# EAGLE board ARM-OB (EAGLE 6.5.0)
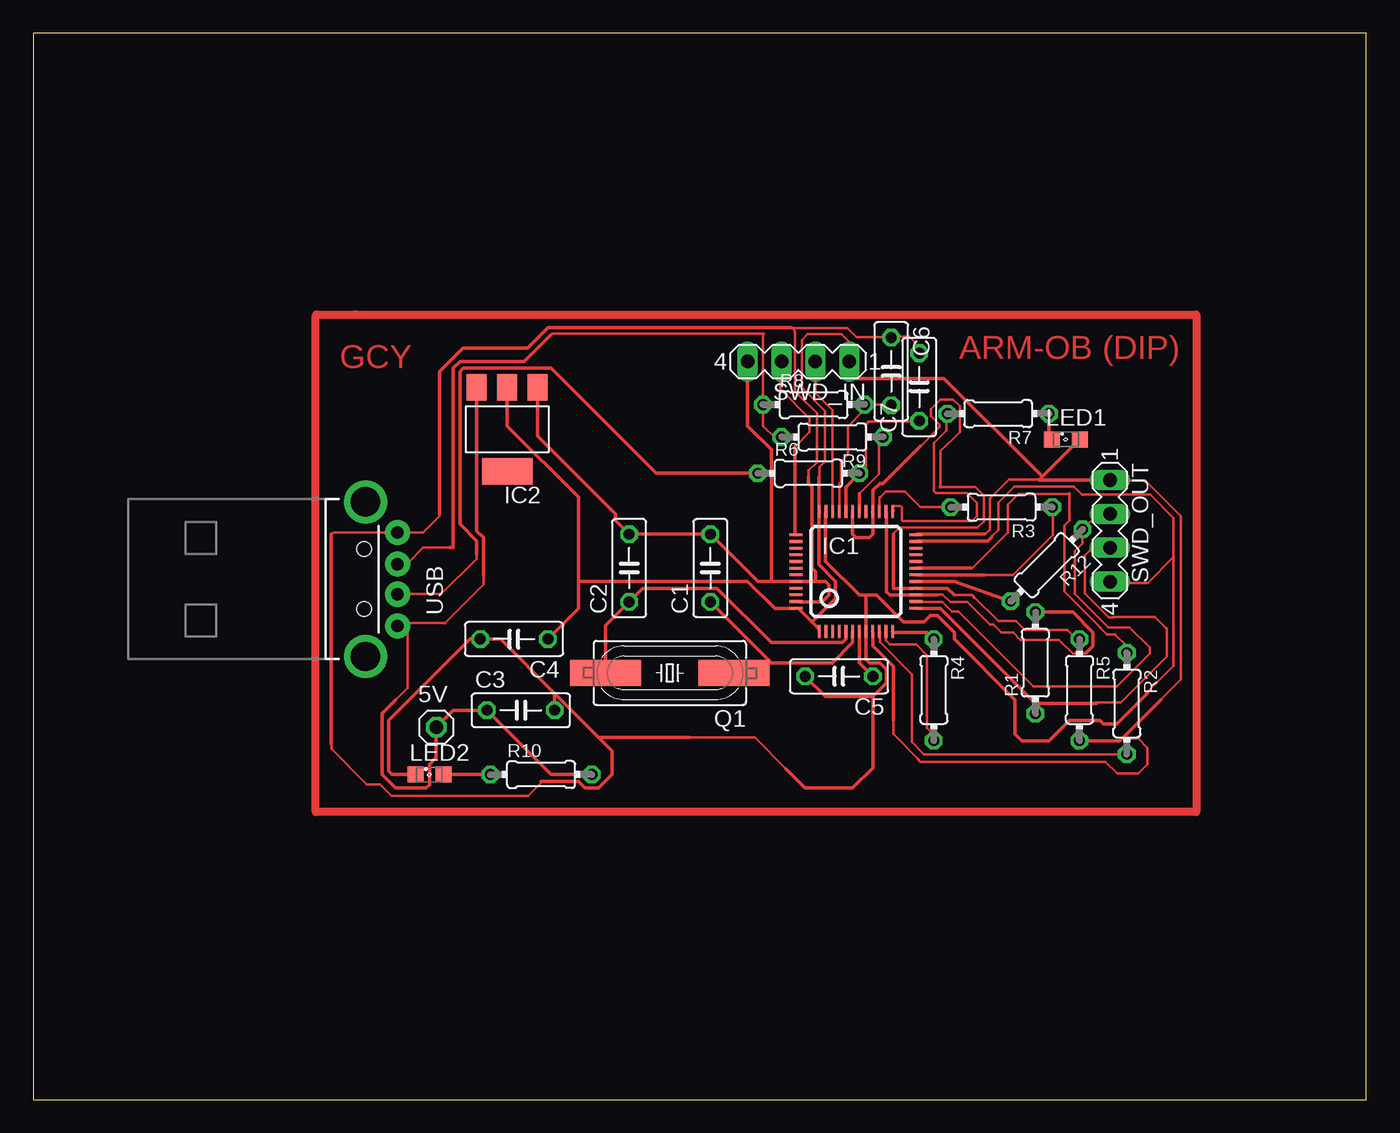
[diagram p0: board, top side]

Size 100 x 80 mm. Coordinates in mm from the lower left corner, seen from the top.
Outline: 0,0 100,0 100,80 0,80 0,0
Copper layers (1*16): Top 0.035mm / dielectric 1.5mm / Bottom 0.035mm
Design rules "default": minimum track width 10mil, minimum drill 24mil, track to track 8mil, track to pad 8mil, pad to pad 8mil, via to via 8mil, smd to smd 8mil, copper to edge 40mil, drill to drill 8mil, minimum pad ring 10mil, minimum via ring 8mil, stop-mask expansion 4mil, vias tented up to drill 0mil, thermal gap 10mil

## Footprints (pad centres in the part's own frame; a part is rotated, then mirrored left to right if it is on the bottom)
1X01 = drill 1.016 octagon: 1 0,0
C050-025X075 = drill 0.813 octagon: 1 -2.54,0; 2 2.54,0
TQFP48 = smd 0.2 x 1: 1 -2.75,-4.5; 2 -2.25,-4.5; 3 -1.75,-4.5; 4 -1.25,-4.5; 5 -0.75,-4.5; 6 -0.25,-4.5; 7 0.25,-4.5; 8 0.75,-4.5; 9 1.25,-4.5; 10 1.75,-4.5; 11 2.25,-4.5; 12 2.75,-4.5; 25 2.75,4.5; 26 2.25,4.5; 27 1.75,4.5; 28 1.25,4.5; 29 0.75,4.5; 30 0.25,4.5; 31 -0.25,4.5; 32 -0.75,4.5; 33 -1.25,4.5; 34 -1.75,4.5; 35 -2.25,4.5; 36 -2.75,4.5 | smd 1 x 0.2: 13 4.5,-2.75; 14 4.5,-2.25; 15 4.5,-1.75; 16 4.5,-1.25; 17 4.5,-0.75; 18 4.5,-0.25; 19 4.5,0.25; 20 4.5,0.75; 21 4.5,1.25; 22 4.5,1.75; 23 4.5,2.25; 24 4.5,2.75; 37 -4.5,2.75; 38 -4.5,2.25; 39 -4.5,1.75; 40 -4.5,1.25; 41 -4.5,0.75; 42 -4.5,0.25; 43 -4.5,-0.25; 44 -4.5,-0.75; 45 -4.5,-1.25; 46 -4.5,-1.75; 47 -4.5,-2.25; 48 -4.5,-2.75
SOT223 = smd 1.499 x 2.007: 1 -2.261,-3.15; 2 0.025,-3.15; 3 2.311,-3.15 | smd 3.81 x 2.007: 4 0,3.15
SML0805 = smd 1.2 x 1.2: A 1.05,0; C -1.05,0
HC49UP = smd 5.334 x 1.93: 1 -4.826,0; 2 4.826,0
0204/7 = drill 0.813 octagon: 1 -3.81,0; 2 3.81,0
MA04-1 = drill 1.016 long: 1 -3.81,0; 2 -1.27,0; 3 1.27,0; 4 3.81,0
USB-A-H = drill 0.914 pad 1.88: D+ 2.4,1.127; D- 2.4,-1.127; GND 2.4,3.5; VBUS 2.4,-3.5 | drill 2.2: GND2 0,-5.8; GND3 0,5.8 | hole 1.1: -0.1,2.25; -0.1,-2.25

## Placement (x,y rotation side)
5V  [1X01]  30.23,27.94 0 top
C1  22pF  [C050-025X075]  50.8,39.88 90 top
C2  22pF  [C050-025X075]  44.7,39.88 90 top
C3  0.1uF  [C050-025X075]  36.58,29.21 0 top
C4  0.1uF  [C050-025X075]  36.07,34.54 180 top
C5  0.1uF  [C050-025X075]  60.45,31.75 180 top
C6  22pF  [C050-025X075]  64.36,54.64 270 top
C7  22pF  [C050-025X075]  66.47,53.47 90 top
FRAME1  FRAME-LETTER  [CREATIVE_COMMONS]  54.61,-31.75 0 top  (outside the outline)
IC1  STM32F10XCXT6  [TQFP48]  61.72,39.62 0 top
IC2  REG1117  [SOT223]  35.56,50.29 180 top
LED1  [SML0805]  77.47,49.53 0 top
LED2  [SML0805]  29.72,24.38 0 top
Q1  8MHz  [HC49UP]  47.75,32 180 top
R1  100  [0204/7]  75.18,32.77 90 top
R2  100  [0204/7]  82.04,29.72 270 top
R3  100  [0204/7]  72.64,44.45 180 top
R4  100  [0204/7]  67.56,30.73 270 top
R5  10k  [0204/7]  78.49,30.73 270 top
R6  68  [0204/7]  58.17,46.99 0 top
R7  1k  [0204/7]  72.39,51.46 180 top
R8  68  [0204/7]  58.55,52.15 0 top
R9  1.5k  [0204/7]  59.94,49.71 180 top
R10  1k  [0204/7]  38.1,24.38 0 top
R12  100  [0204/7]  76.02,40.08 225 top
SWD_IN  [MA04-1]  57.4,55.37 180 top
SWD_OUT  [MA04-1]  80.77,42.67 270 top
USB  USB-A-H  [USB-A-H]  24.92,39.04 0 top

## Library data of the parts
5V = pinhead
C1-C7 R1-R10 R12 = resistor
FRAME1 = SparkFun-Aesthetics
IC1 = stm32
IC2 = burr-brown; MPN: REG1117; OC_FARNELL: 1097566; OC_NEWARK: 14P6981
LED1 LED2 = led
Q1 = adafruit; OC_FARNELL: unknown; OC_NEWARK: unknown
SWD_IN SWD_OUT = con-lstb; OC_FARNELL: unknown; OC_NEWARK: unknown
USB = SparkFun-Connectors

## Nets
D+UP: IC1.30
D-: IC1.32 R6.2
N$1: C5.1 IC1.7
N$4: R6.1
N$5: C2.1 IC1.5 Q1.2
N$6: C1.1 IC1.6 Q1.1
N$7: LED2.A R10.1
N$8: LED1.C R7.1
S$2: IC1.9
S$3: IC1.25
S$4: IC1.24
S$5: IC1.23
S$8: IC1.19
S$11: R5.2
S$14: IC1.14 R12.1
S$24: IC1.16
S$26: R1.2
S$30: C1.2 C2.2 IC1.44 IC1.47 IC2.1 SWD_IN.4
S$32: C5.2 IC1.8 IC1.35
S$34: LED1.A SWD_OUT.1
S$38: IC1.28 IC1.31
S$42: IC2.3
S$47: C3.2 C4.2 LED2.C
SWCLK_IN: IC1.37
SWDIO_IN: IC1.34 SWD_IN.2
TCK_I: IC1.13 R1.1
TCK_O: IC1.15 IC1.26
TDI_I: IC1.18
TDI_O: IC1.27 R3.2
TMS_O: IC1.17 R12.2
TRES_I: IC1.12 R4.1
TRST_O: IC1.10 R2.2
VCC: 5V.1 C3.1 R10.2
VDD: C4.1 IC1.1 IC1.36 IC1.48 IC2.2

## Tracks (layer width: path | path; a pad name or v marks a point on that pad's centre or on a via)
D+UP
  Top 0.254: 61.98,45.47 61.98,44.2 IC1.30
D-
  Top 0.203: 62.46,50.55 62.46,47.47 R6.2
  Top 0.254: R6.2 60.96,45.97 60.96,44.2 IC1.32
GND
  Top 0.203: 57.4,52.91 57.15,53.16 57.15,57.66 56.9,57.91 | 30.48,44.02 30.48,43.76 29.26,42.55 22.53,42.55 22.35,42.37
  Top 0.254: 22.35,26.67 22.35,42.37 22.35,42.42 | 56.9,57.91 38.61,57.91 37.08,56.39 32.26,56.39 30.48,54.61 30.48,44.02 30.48,43.94
N$1
  Top 0.254: C5.1 61.98,32.77 61.98,35.05 IC1.7
N$2
  Top 0.203: 54.81,57.48 38.94,57.48 38.58,57.12 | 31.24,41.4 29.26,41.4 28.09,40.23
  Top 0.254: 31.24,41.4 31.5,41.4 31.5,54.86 32,55.37 36.83,55.37 38.58,57.12 38.86,57.4
N$3
  Top 0.203: 64.52,44.53 65.05,44.53 65.15,44.42 65.15,43.48 65.23,43.41 70.43,43.41 70.79,43.76 70.79,44.76 70.05,45.49
N$4
  Top 0.254: R6.1 46.74,46.99 38.86,54.86 32.26,54.86 32,54.61 32,43.18 33.27,41.91 33.27,40.89
N$5
  Top 0.254: IC1.5 60.96,35.05 60.96,34.54 60.71,34.29 55.37,34.29 51.31,38.35 45.72,38.35 C2.1 42.93,35.56 Q1.2
N$6
  Top 0.254: 55.37,32.77 53.34,32.77 Q1.1 | 55.37,32.77 59.94,32.77 61.47,34.29 61.47,35.05 IC1.6 | 55.37,32.77 C1.1
N$7
  Top 0.254: R10.1 LED2.A
N$8
  Top 0.254: R7.1 76.2,49.53 LED1.C
S$1
  Top 0.203: 63.96,34.8 63.96,34.44 64.26,34.14 66.24,34.14 67.06,33.33 67.06,27.86 67.61,27.3
S$2
  Top 0.203: 64.52,28.5 64.52,27.43 66.34,25.6 66.34,25.58 66.57,25.35 80.44,25.35 81.33,24.46 82.91,24.46 83.59,25.15 83.59,26.39 82.91,27.08 81.71,27.08 81.58,26.95
  Top 0.254: IC1.9 62.99,35.05 62.99,34.04 64.52,32.51 64.52,28.5 64.52,28.45
S$3
  Top 0.254: 64.52,44.2 IC1.25
S$4
  Top 0.254: 71.37,42.42 66.29,42.42 IC1.24
S$5
  Top 0.254: 71.88,42.16 71.63,41.91 66.29,41.91 IC1.23
S$6
  Top 0.203: 71.35,42.47 71.48,42.47 71.78,42.77 71.78,45.11 73.2,46.53 75.54,46.53
S$7
  Top 0.203: 71.93,42.24 71.93,42.27 72.42,42.75 72.42,44.81 73.61,46 78.05,46 78.72,45.34
S$8
  Top 0.254: 70.36,39.88 66.29,39.88 IC1.19
S$9
  Top 0.203: 70.43,39.88 70.46,39.88 73.13,42.55 73.13,44.65 73.89,45.41 77.75,45.41 77.78,45.44
S$10
  Top 0.203: 71.32,39.34 73.51,39.34 76.5,42.34 76.5,43.84 76.61,43.94
S$11
  Top 0.254: 84.58,29.97 81.53,26.92 R5.2
S$12
  Top 0.203: 69.14,37.85 70.41,37.85 70.61,37.64
S$13
  Top 0.203: 82.07,46.46 83.44,46.46 86.11,43.79 86.11,31.52 84.48,29.9
S$14
  Top 0.203: R12.1 78.72,41.71 78.16,41.15 78.16,37.92 80.64,35.43 82.25,35.43 83.77,33.91 83.77,33.48 81.28,30.99 75.03,30.99 69.42,36.6 68.94,36.6 68.22,37.31 66.28,37.31 IC1.14
S$15
  Top 0.203: 78.69,45.39 83.8,45.39 85.55,43.64 85.55,40.69 | 85.55,40.69 83.62,38.76 82.04,38.76 | 85.55,40.69 85.55,32.54 83.59,30.58 83.59,30.53 83.41,30.35
S$16
  Top 0.203: 83.64,30.61 83.49,30.45
S$17
  Top 0.203: 81.15,34.9 81.99,34.06
S$18
  Top 0.203: 81.18,34.9 80.54,34.9 80.03,35.41 80.03,35.43
S$19
  Top 0.203: 81.03,36.17 80.7,36.17 78.89,37.97 78.89,40.82 79.58,41.5
S$20
  Top 0.203: 81.03,36.2 84.15,36.2 84.96,35.38
S$21
  Top 0.203: 85.04,35.36 85.04,33.25 81.58,29.79 79.73,29.79 79.6,29.67
S$22
  Top 0.203: 79.55,43.71 79.55,43.61 79.1,43.16
S$23
  Top 0.203: 77.75,45.49 77.75,43.43 77.37,43.05 77.37,38.12 80.11,35.38
S$24
  Top 0.254: 69.09,37.85 68.58,38.35 66.29,38.35 IC1.16 66.04,38.35 64.52,38.35 64.52,42.42
S$25
  Top 0.203: 70.56,37.74 70.56,37.72 72.39,35.89 73.74,35.89 74.4,35.23 77.6,35.23 78.08,34.75
S$26
  Top 0.254: 78.99,33.53 79.5,34.04 79.5,35.05 77.98,36.58 R1.2
S$27
  Top 0.203: 67.87,37.9 68.22,37.9 68.81,37.31 70.08,37.31 71.75,35.64 72.03,35.64 72.64,35.03 73.53,35.03 74.07,34.49 76.96,34.49 77.98,33.48 78.97,33.48 79.1,33.6
S$28
  Top 0.203: 54.76,57.48 54.76,52.4 54.76,52.3 54.76,50.55 55.63,49.68
S$29
  Top 0.203: 57.1,49 57.17,49 58.24,50.06 58.24,51.1 56.06,53.29 56.06,54.41 56.11,54.46
S$30
  Top 0.203: 58.17,47.24 58.17,46.71
  Top 0.254: IC1.47 57.4,37.34 59.18,37.34 59.69,37.85 59.69,38.61 59.44,38.86 58.67,38.86 | 58.17,46.74 58.17,46.71 58.17,46.23 58.42,45.97 58.42,39.88 58.67,39.62 58.67,38.86 | 58.67,38.86 57.4,38.86 IC1.44 57.15,38.86 55.37,38.86 | SWD_IN.4 53.59,50.55 55.37,48.77 55.37,38.86 | 37.85,53.59 IC2.1 37.85,53.34 37.85,49.78 43.69,43.94 43.69,43.43 C2.2 C1.2 54.36,38.86 55.37,38.86
S$31
  Top 0.203: 57.38,52.91 58.78,51.51 58.78,47.8 58.19,47.22
S$32
  Top 0.203: 49.3,27.15 54.13,27.15 56.46,24.82
  Top 0.254: 83.57,30.48 81.28,28.19 80.26,28.19 80.01,28.45 77.72,28.45 76.2,26.92 74.17,26.92 73.66,27.43 73.66,29.97 69.09,34.54 69.09,35.05 67.82,36.32 67.31,36.32 66.8,35.81 65.28,35.81 63.25,37.85 62.48,37.85 | IC1.35 59.44,43.94 59.44,40.39 61.98,37.85 62.48,37.85 | 62.48,37.85 62.48,35.31 IC1.8 62.48,35.05 62.48,33.02 62.74,32.77 63.5,32.77 64.01,32.26 64.01,31.24 62.99,30.23 | C5.2 59.44,30.23 62.99,30.23 | 62.99,30.23 62.99,24.89 61.47,23.37 57.91,23.37 56.46,24.82
S$33
  Top 0.203: 58.98,46.76 58.98,47.45 59.41,47.88 59.41,51.66 57.66,53.42 57.66,57 58.09,57.43 60.63,57.43 61.32,56.74
S$34
  Top 0.254: SWD_OUT.1 75.44,46.48 75.69,46.74 | LED1.A 78.49,49.53 75.69,46.74 | 75.69,46.74 68.33,54.1 61.21,54.1
S$35
  Top 0.203: 64.62,54.13 64.67,54.08
S$36
  Top 0.203: 62.03,45.44 62.03,45.49 63.45,46.91 63.45,49.2 63.52,49.28
S$37
  Top 0.203: 62.46,50.57 62.46,50.65 62.66,50.85 65.96,50.88
S$38
  Top 0.254: 66.55,49.02 63.75,46.23 63.5,46.23 62.99,45.72 62.99,44.2 IC1.28 62.99,43.94 62.99,42.42 62.74,42.16 61.72,42.16 61.47,42.42 61.47,43.94 IC1.31
S$39
  Top 0.203: 70.05,45.52 67.72,45.52 67.56,45.67 67.56,49.25 68.5,50.19 68.5,50.93
S$40
  Top 0.203: 66.57,49.07 66.62,49.07 68,50.44 68,50.65 67.36,51.28 67.36,51.82 68.07,52.53 69.01,52.53 69.52,52.02 69.52,50.09 68.07,48.64 68.07,46.02 68.1,46
S$41
  Top 0.203: 66.14,56.34 66.14,56.82 65.73,57.23 64.95,57.23 64.92,57.2 61.77,57.2 61.09,57.89 56.9,57.89 56.82,57.96
S$42
  Top 0.203: 33.78,39.4 33.78,38.63 30.89,35.74 | 30.89,35.74 30.86,35.71 | 30.89,35.74 28.65,35.74 28.63,35.74 28.04,35.74
  Top 0.254: IC2.3 33.27,53.34 33.27,42.67 33.78,42.16 33.78,39.4 33.78,39.37
S$43
  Top 0.203: 63.78,52.15 62.94,52.15 62.87,52.07
S$44
  Top 0.203: 62.26,51.66 62.26,51.64 61.11,50.49 61.11,48.39 60.6,47.88 60.6,46.33 60.48,46.2 60.48,44.45
S$45
  Top 0.203: 33.25,40.97 33.25,40.56 30.61,37.92 28.09,37.92
S$46
  Top 0.61: 24.13,58.9 24.21,58.9 87.25,58.9 87.25,21.57 21.18,21.57 21.18,58.83 21.23,58.83 21.23,58.9 24.13,58.9
S$47
  Top 0.203: 22.38,26.7 22.38,26.29 25.02,23.65 26.01,23.65 26.87,22.78 37.11,22.78 38.2,23.88
  Top 0.254: 38.1,23.88 38.2,23.88 40.89,23.88 41.4,23.37 42.42,23.37 43.43,24.38 43.43,26.16 42.42,27.18 | 42.42,27.18 49.28,27.18 | C3.2 39.12,30.48 | 39.12,30.48 42.42,27.18 | 39.12,30.48 35.05,34.54 C4.2 32.77,34.54 26.67,28.45 26.67,24.64 26.92,24.38 LED2.C
S$48
  Top 0.203: 28.07,35.18 28.07,30.89 27.13,29.95
SWCLK_IN
  Top 0.254: 57.15,49.02 57.15,42.42 IC1.37
SWDIO_IN
  Top 0.203: SWD_IN.2 58.67,53.01 59.97,51.71 IC1.34
TCK_I
  Top 0.254: 75.18,29.72 68.07,36.83 66.29,36.83 IC1.13 | R1.1 75.18,29.72 | 75.18,29.72 79.76,29.72
TCK_O
  Top 0.254: IC1.26 64.01,43.94 64.01,38.1 64.26,37.85 66.04,37.85 IC1.15 66.29,37.85 67.82,37.85
TDI_I
  Top 0.254: 71.37,39.37 66.29,39.37 IC1.18
TDI_O
  Top 0.203: R3.2 66.57,44.45 65.41,45.62 63.96,45.62 63.55,45.21 63.52,45.21 63.48,45.16 IC1.27
TDO_I
  Top 0.203: 68.07,46 68.12,45.95 70.69,45.95 71.32,45.31 71.32,43.38 70.84,42.9 64.97,42.9 64.54,42.47
  Top 0.254: 68.07,45.97 68.07,46
TMS_O
  Top 0.254: R12.2 69.09,38.86 66.29,38.86 IC1.17
TRES_I
  Top 0.254: R4.1 67.06,35.05 64.52,35.05 IC1.12
TRST_O
  Top 0.203: R2.2 66.83,25.91 65.91,26.82 65.91,31.9 63.5,34.31 63.5,35.1 IC1.10
VCC
  Top 0.254: R10.2 38.86,24.38 C3.1 31.5,29.21 5V.1 30.23,25.65 29.72,25.15 29.72,23.62 29.46,23.37 27.18,23.37 26.16,24.38 26.16,28.96 27.18,29.97
VDD
  Top 0.254: 40.89,38.86 40.89,36.83 C4.1 | 40.89,38.86 40.89,45.21 35.56,50.55 35.56,53.34 IC2.2 | 58.42,35.81 57.4,36.83 IC1.48 57.15,36.83 55.63,36.83 53.59,38.86 40.89,38.86 | 58.42,35.81 58.93,35.31 IC1.1 | 58.93,46.74 58.93,44.2 IC1.36 58.93,43.94 58.93,40.13 60.2,38.86 60.2,37.59 58.42,35.81

## Text on the board
Top: ARM-OB (DIP) | GCY